# Altium PCB PCB_capt_inf.PcbDoc
Units mm, origin at the board's own origin, x right, y up, seen from the top; angles counter-clockwise.
Board outline 27.65 x 15 mm, 2 copper layers (Top Layer, Bottom Layer); 1 components, 3 nets, 10 pads, 0 vias.
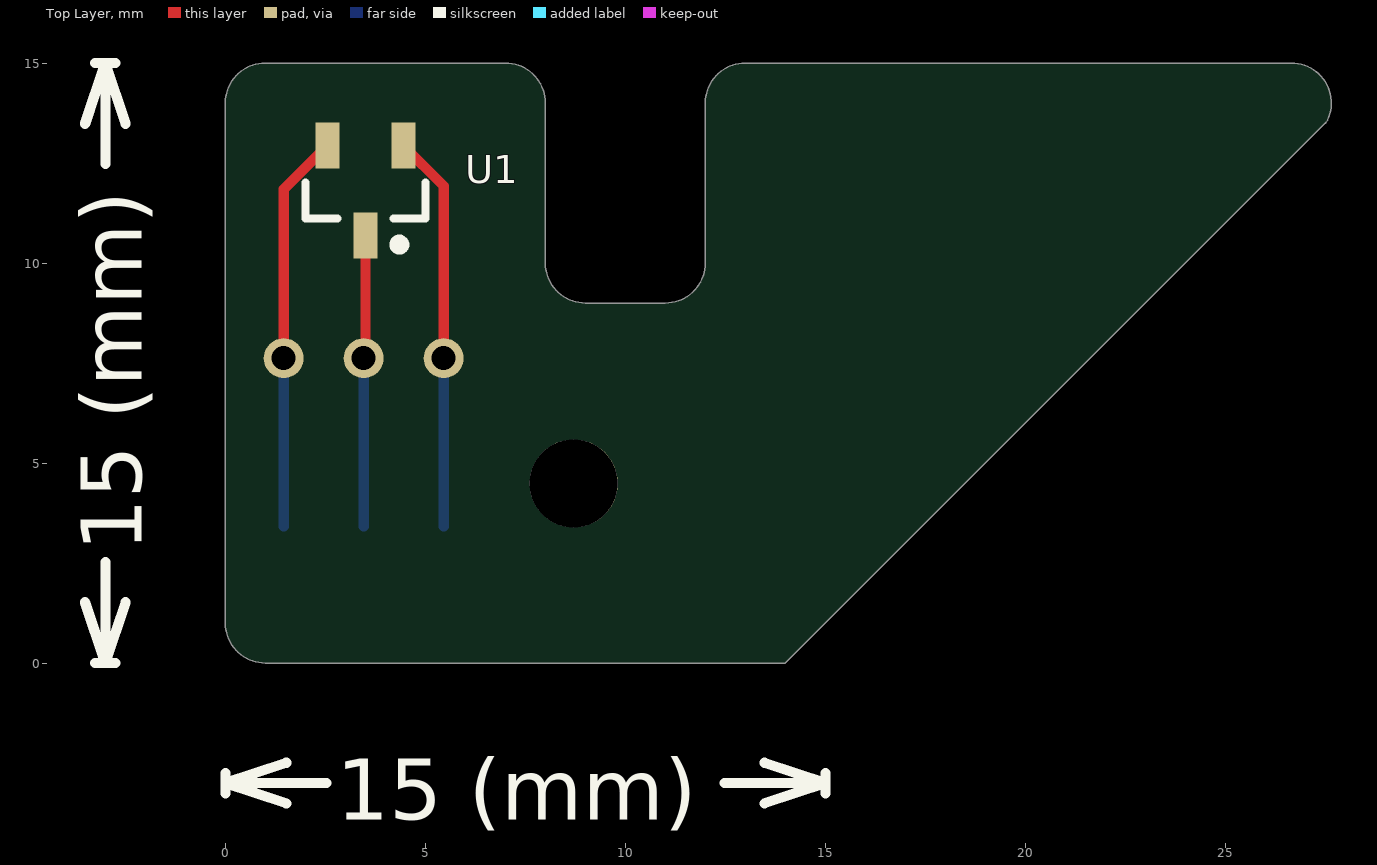
[diagram p0: Top Layer view]
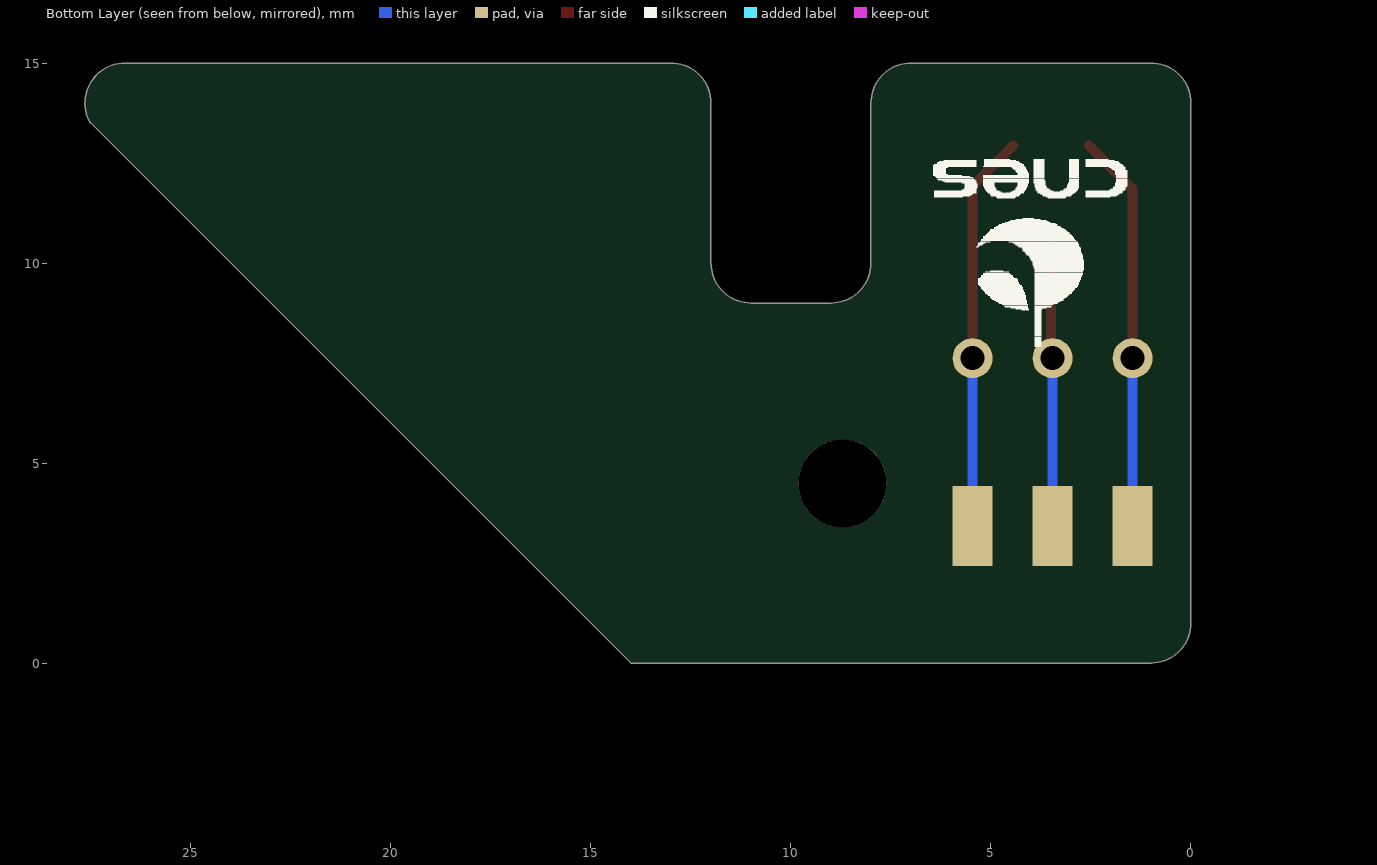
[diagram p1: Bottom Layer view, seen from below]

## Layer stack, top to bottom
Top Solder: solder mask 0.0102, Solder Resist, Dk 3.5
Top Layer: signal copper 0.0356
Dielectric1: dielectric 0.32, FR-4, Dk 4.8
Bottom Layer: signal copper 0.0356
Bottom Solder: solder mask 0.0102, Solder Resist, Dk 3.5

## Board outline
0,1 0,14 cw(c1,14) 1,15 7,15 cw(c7,14) 8,14 8,10 ccw(c9,10) 9,9 11,9 ccw(c11,10) 12,10 12,14 cw(c13,14) 13,15 26.65,15 cw(c26.65,14) 27.516,13.5 27.525,13.525 14,0 1,0 cw(c1,1)

## Design rules (kind name [scope] priority, off if disabled: settings)
Clearance [All] p1: gap=0.254
PolygonConnect [All] p1: connectstyle=Relief reliefconductorwidth=0.254 reliefentries=4 polygonreliefangle="90 Angle" airgapwidth=0.254
RoutingVias [All] p1: holewidth=0.711 width=1.27 viastyle="Through Hole" minholewidth=0.711 minwidth=1.27 maxholewidth=0.711 maxwidth=1.27
SolderMaskExpansion [All] p1: expansion=0.102
Width [All] p1: maxlimit=0.254 minlimit=0.254 preferedwidth=0.254
29 further rules are at their usual default settings.

## Components (designator, comment, footprint, x,y, rotation, side; value= is the part's Value field where it differs from the comment)
U1 "7805" SOT23_N 3.5,11.81 r270 top (schematic designator U?)

## Footprints (in the part's own frame and the unit in brackets; to place one, negate y for a bottom-side part, rotate by r counter-clockwise, add the part's x,y. Pads: shape width x height; smd on the part's side, far side on the other; paste and mask are expansions set on the pad)
SOT23_N [mm] "SOT23, 3-Leads, Body 2.9x1.3mm, Pitch 0.95mm, Lead Span 2.3mm - Reverse Pinning, IPC Medium Density"
  rect 1.15x0.6 smd: 1(1.125,0) 2(-1.125,-0.95) 3(-1.125,0.95)
  silkscreen extent -0.2,-1.5 1.47,1.5, body extent -0.7,-1.5 0.7,1.5, height 1.1

## Part data
U1: library part LM7805, "3-Terminal Positive 5V Regulator"

## Free pads (board coordinates)
  round 2.2 hole 2.2: 0(8.71,4.49)
  rect 1x2 smd far side: 1(1.46,3.42) 2(3.46,3.42) 3(5.46,3.42)
  round 1 hole 0.6: 1(1.46,7.62) 1(3.46,7.62) 1(5.46,7.62)

## Nets (pads, with @x,y where several pads share a name; then routed paths per layer and width w, separated by ;. In a path a pad name is that pad's centre, name@x,y a point inside that pad or via, vN(x,y) a via of type N, cw(c..) or ccw(c..) an arc to the next point about the centre after c; other vN are vias at no path point)
GND: pad.1@3.46,7.62 pad.2 U1.1 | length 7.3
  Top Layer w0.254: pad.1@3.46,7.62 3.5,7.66 U1.1
  Bottom Layer w0.254: pad.2 pad.1@3.46,7.62
OUT: pad.1@1.46,3.42 pad.1@1.46,7.62 U1.2 | length 10
  Top Layer w0.254: pad.1@1.46,7.62 1.46,11.845 U1.2
  Bottom Layer w0.254: pad.1@1.46,3.42 pad.1@1.46,7.62
VCC: pad.1@5.46,7.62 pad.3 U1.3 | length 9.9
  Top Layer w0.254: U1.3 5.46,11.925 pad.1@5.46,7.62
  Bottom Layer w0.254: pad.3 pad.1@5.46,7.62

## Silkscreen, mask and mechanical layers (free items; w line width, h text height)
Top Overlay:
  lines w0.254: -3.508,1.524 -3,0 ; -3.508,13.476 -3,15 ; -3.254,0 -2.746,0 ; -3.254,15 -2.746,15 ; -3,2.523 -3,0 ; -3,12.477 -3,15 ; -2.492,1.524 -3,0 ; -2.492,13.476 -3,15 ; 0,-3.254 0,-2.746 ; 1.524,-3.508 0,-3 ; 1.524,-2.492 0,-3 ; 2.523,-3 0,-3 ; 12.477,-3 15,-3 ; 13.476,-3.508 15,-3 ; 13.476,-2.492 15,-3 ; 15,-3.254 15,-2.746
  text "15 (mm)" at -2.086,2.777 h1.52 r90
  text "15 (mm)" at 2.777,-3.914 h1.52
Bottom Overlay:
  drawing of 368 lines, arcs and shapes, not listed
Mechanical 1:
  lines w0.1: 27.516,13.5 ccw(c26.65,14) 26.65,15 13,15 ccw(c13,14) 12,14 12,10 cw(c11,10) 11,9 9,9 cw(c9,10) 8,10 8,14 ccw(c7,14) 7,15 1,15 ccw(c1,14) 0,14 0,1 ccw(c1,1) 1,0 14,0 27.525,13.525